# Altium PCB 电机驱动.PcbDoc
Units mil, origin at the board's own origin, x right, y up, seen from the top; angles counter-clockwise.
Board outline 3865 x 3100 mil, 2 copper layers (Top Layer, Bottom Layer); 29 components, 19 nets, 90 pads, 244 vias.
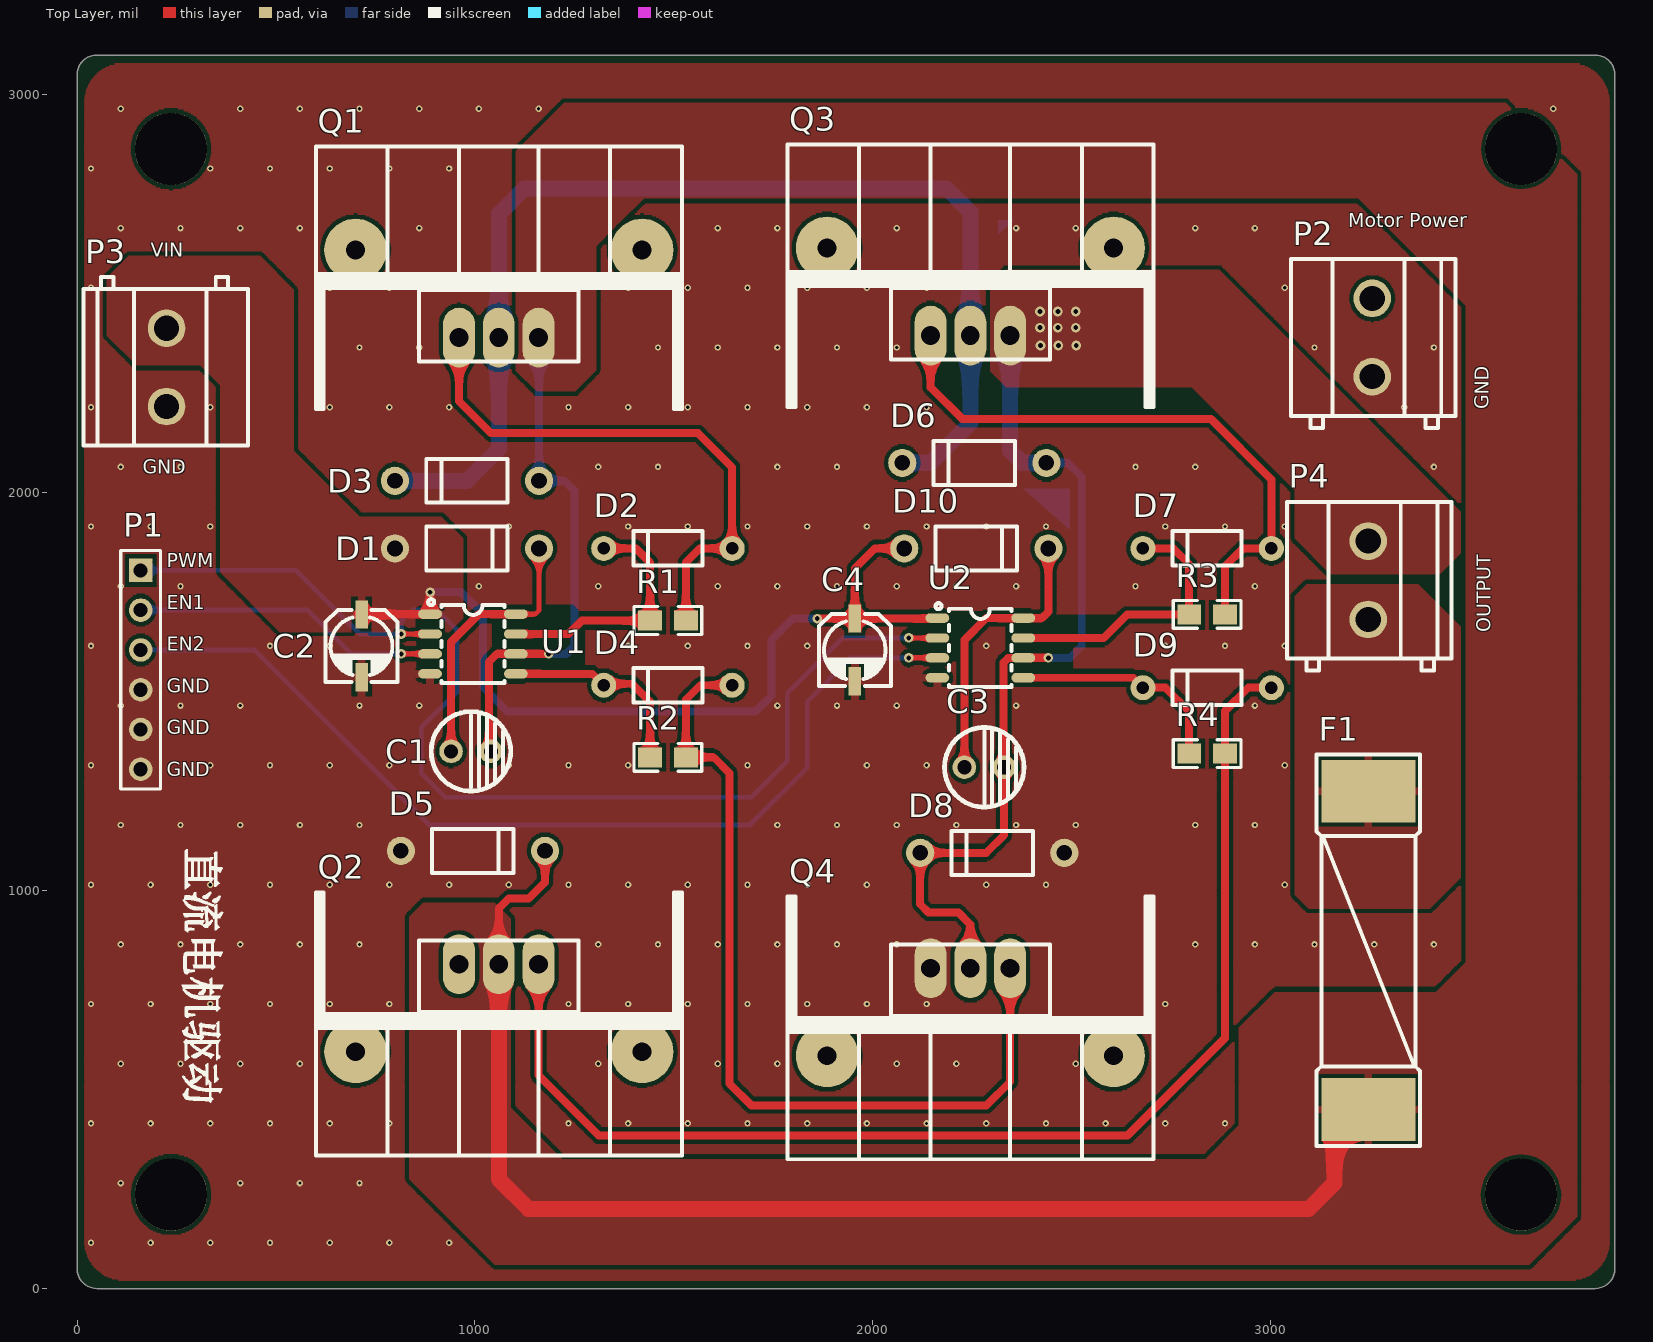
[diagram p0: Top Layer view]
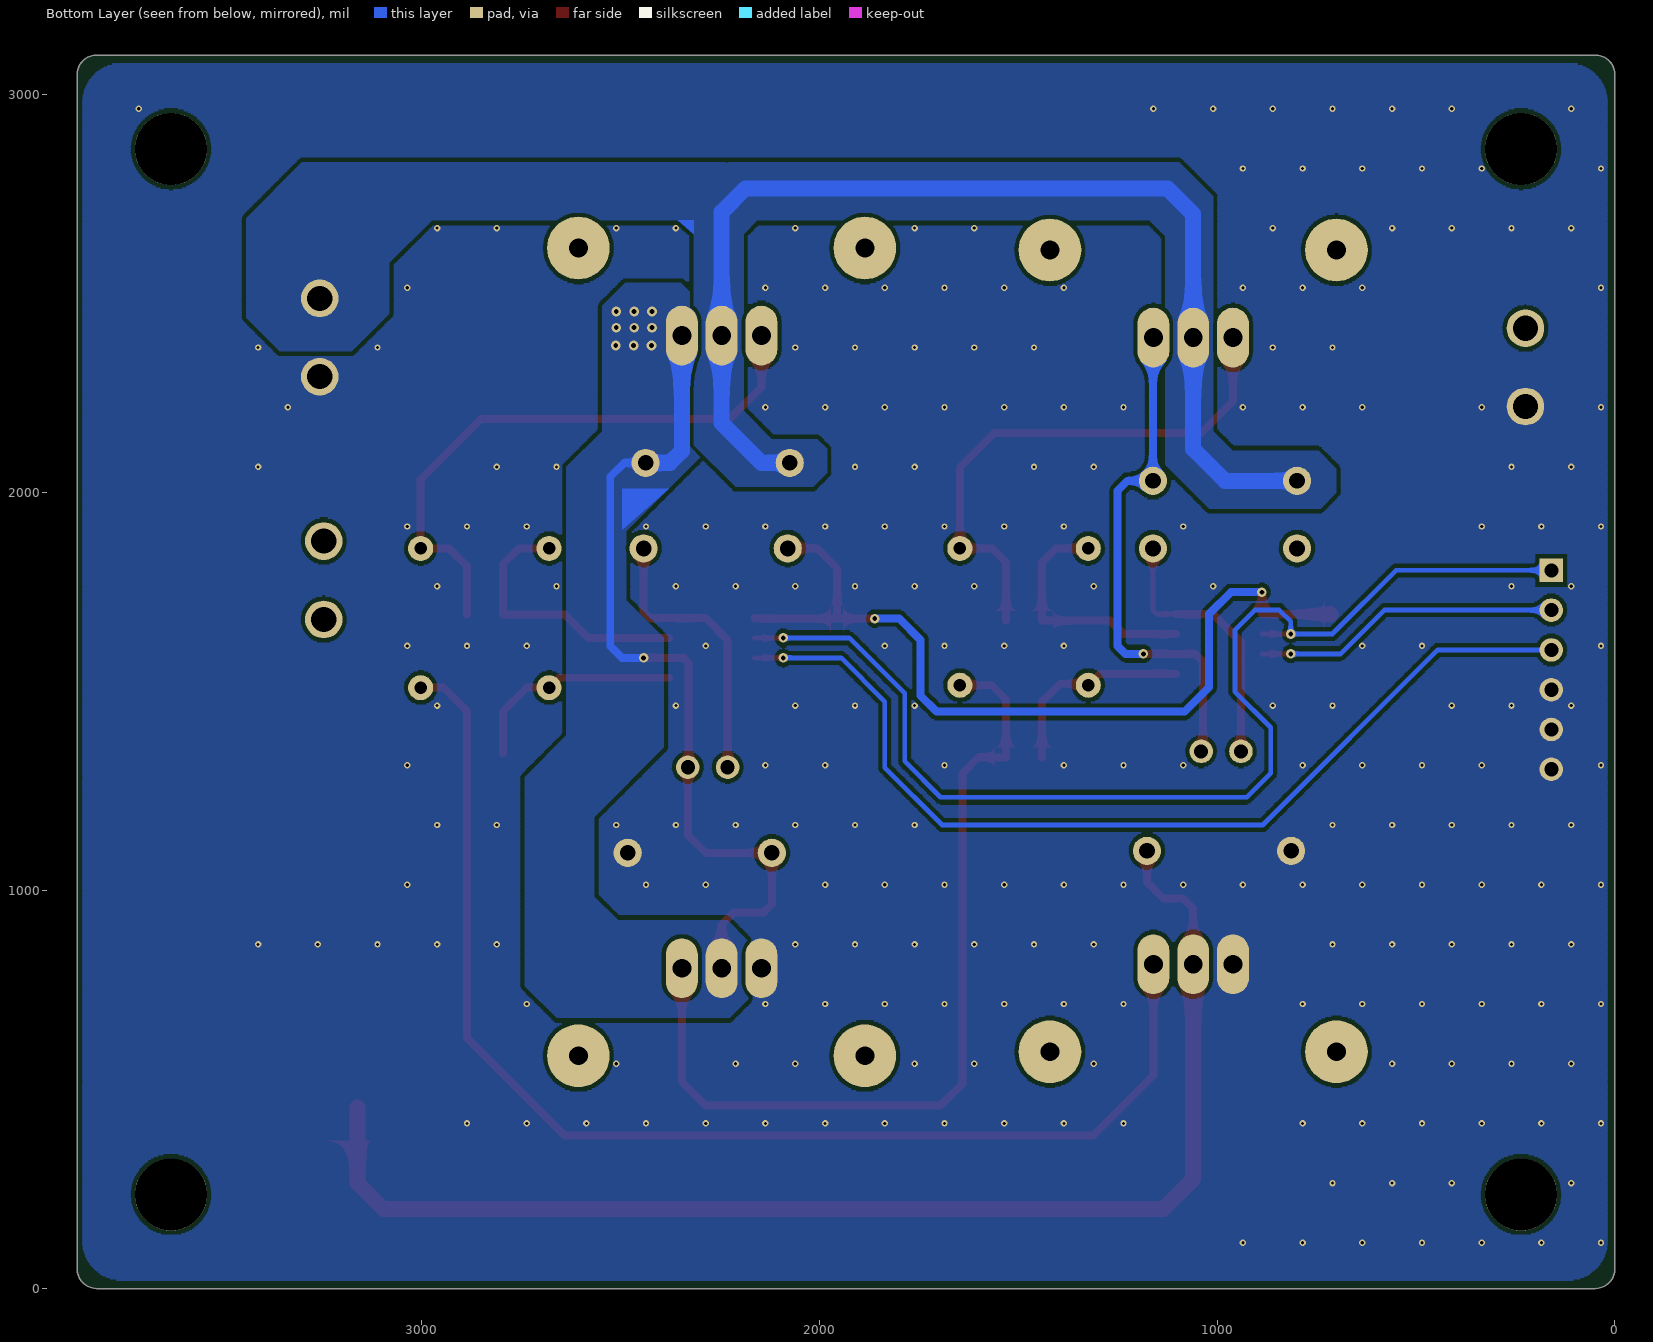
[diagram p1: Bottom Layer view, seen from below]

## Layer stack, top to bottom
Top Solder: solder mask 0.4, Solder Resist, Dk 3.5
Top Layer: signal copper 1.4
Dielectric 1: dielectric 12.6, FR-4, Dk 4.8
Bottom Layer: signal copper 1.4
Bottom Solder: solder mask 0.4, Solder Resist, Dk 3.5

## Board outline
0,50 ccw(c50,50) 50,0 3815,0 ccw(c3815,50) 3865,50 3865,3050 ccw(c3815,3050) 3815,3100 50,3100 ccw(c50,3050) 0,3050

## Design rules (kind name [scope] priority, off if disabled: settings)
Clearance [All] p1: gap=10 ignorepadtopadclearanceinfootprint=FALSE except(0: Arc-Hole Track-Hole SMDPad-Hole THPad-Hole Via-Hole Fill-Hole Poly-Hole Region-Hole Text-Hole; 24: Arc-Arc Arc-Track Track-Track)
PolygonConnect [All] p1: thpad.connectstyle=Direct thpad.reliefconductorwidth=20 thpad.reliefentries=4 thpad.polygonreliefangle="90 Angle" thpad.airgapwidth=10 smdpad.connectstyle=Relief smdpad.reliefconductorwidth=20 smdpad.reliefentries=4 smdpad.polygonreliefangle="90 Angle" smdpad.airgapwidth=10 via.connectstyle=Direct via.reliefconductorwidth=20 via.reliefentries=4 via.polygonreliefangle="90 Angle" via.airgapwidth=10
RoutingVias [All] p1: holewidth=12 width=24 viastyle="Through Hole" minholewidth=12 minwidth=24 maxholewidth=12 maxwidth=24
SolderMaskExpansion [All] p1: expansion=4
Width Signal [InNetClass('signal')] p1: maxlimit=12 minlimit=12 preferedwidth=12
Width [InNetClass('PWR')] p2: maxlimit=40 minlimit=20 preferedwidth=20
30 further rules are at their usual default settings.

## Components (designator, comment, footprint, x,y, rotation, side; value= is the part's Value field where it differs from the comment)
C1 "1.5u" CAP.1/.2 990,1345 r0 top
C2 "100nF" CAP-SMD_BD4.0-L4.3-W4.3-FD 715,1615 r270 top
C3 "1.5u" CAP.1/.2 2280,1305 r0 top
C4 "100nF" CAP-SMD_BD4.0-L4.3-W4.3-FD 1955,1605 r270 top
D1 "FR104_C402245" DO-41_BD2.4-L4.7-P8.70-D0.9-RD 980,1860 r180 top
D2 "1N4148" DO-35_BD2.0-L4.2-P8.20-D0.5-RD 1485,1860 r0 top
D3 "1N5819" DO-41_BD2.4-L4.7-P8.70-D0.9-RD 980,2030 r0 top
D4 "1N4148" DO-35_BD2.0-L4.2-P8.20-D0.5-RD 1485,1516.2 r0 top
D5 "1N5819" DO-41_BD2.4-L4.7-P8.70-D0.9-RD 995,1100 r180 top
D6 "1N5819" DO-41_BD2.4-L4.7-P8.70-D0.9-RD 2255,2075 r0 top
D7 "1N4148" DO-35_BD2.0-L4.2-P8.20-D0.5-RD 2840,1860 r0 top
D8 "1N5819" DO-41_BD2.4-L4.7-P8.70-D0.9-RD 2300,1095 r0 top
D9 "1N4148" DO-35_BD2.0-L4.2-P8.20-D0.5-RD 2840,1510 r0 top
D10 "FR104_C402245" DO-41_BD2.4-L4.7-P8.70-D0.9-RD 2260,1860 r180 top
F1 "250V 20A" FUSE-SMD_5*20MM 3245,850 r270 top
P1 "GPIO" HDR1X6 160,1805 r270 top
P2 "KF128-5.0-2P" CONN-TH_P5.00_KF128-5.0-2P 3255,2390 r90 top
P3 "KF128-5.0-2P" CONN-TH_P5.00_KF128-5.0-2P 225,2315 r270 top
P4 "KF128-5.0-2P" CONN-TH_P5.00_KF128-5.0-2P 3245,1780 r90 top
Q1 "RU7088" TO-220散热1 695,2615 r0 top
Q2 "RU7088" TO-220散热1 1425,590 r180 top
Q3 "RU7088" TO-220散热1 1880,2620 r0 top
Q4 "RU7088" TO-220散热1 2610,580 r180 top
R1 "30R" 0805R 1440,1678.8 r0 top
R2 "30R" 0805R 1440,1335 r0 top
R3 "30R" 0805R 2795,1694.31 r0 top
R4 "30R" 0805R 2795,1344.31 r0 top
U1 "IR2104" SOIC-8_L4.9-W3.9-P1.27-LS6.0-BL 995,1620 r270 top
U2 "IR2104" SOIC-8_L4.9-W3.9-P1.27-LS6.0-BL 2270,1610 r270 top

## Footprints (in the part's own frame and the unit in brackets; to place one, negate y for a bottom-side part, rotate by r counter-clockwise, add the part's x,y. Pads: shape width x height; smd on the part's side, far side on the other; paste and mask are expansions set on the pad)
0805R [mil]
  rect 60x50 smd: 1(0,0) 2(90,0)
  silkscreen extent -40,-35 130,35, body extent -4,-25 94,24, height 31
CAP-SMD_BD4.0-L4.3-W4.3-FD [mil]
  rect 70.86x31.5 smd: 1(-78.74,0) 2(78.74,0)
  silkscreen extent -91,-90 91,91
CAP.1/.2 [mm]
  round 1.5 hole 0.9: 1(-1.27,0.127) 2(1.27,0.127)
  silkscreen extent -2.54,-2.41 2.54,2.66, body extent -2.41,-2.33 2.59,2.67, height 11
CONN-TH_P5.00_KF128-5.0-2P [mm]
  round 2.4 hole 1.6: 1(-2.5,0) 2(2.5,0)
  silkscreen extent -5.76,-5.3 5,5.2
DO-35_BD2.0-L4.2-P8.20-D0.5-RD [mm]
  round 1.6 hole 0.8: 1(-4.1,0) 2(4.1,0)
  silkscreen extent -2.2,-1.1 2.2,1.1
DO-41_BD2.4-L4.7-P8.70-D0.9-RD [mm]
  round 1.8 hole 1: 1(-4.6,0) 2(4.6,0)
  silkscreen extent -2.6,-1.4 2.6,1.4
FUSE-SMD_5*20MM [mm]
  rect 4x6 smd: 1(-10.16,0) 2(10.16,0)
  silkscreen extent -12.5,-3.3 12.5,3.3
HDR1X6 [mm] "Connector; Header; 6 Position"
  rect 1.5x1.5 hole 0.9: 1(0,0)
  round 1.5 hole 0.9: 2(2.54,0) 3(5.08,0) 4(7.62,0) 5(10.16,0) 6(12.7,0)
  silkscreen extent -1.27,-1.27 13.97,1.27, body extent -1.27,-1.27 13.97,1.27, height 8.54
SOIC-8_L4.9-W3.9-P1.27-LS6.0-BL [mm]
  oval 0.6x1.518 smd: 1(-1.905,-2.74) 2(-0.635,-2.74) 3(0.635,-2.74) 4(1.905,-2.74) 5(1.905,2.74) 6(0.635,2.74) 7(-0.635,2.74) 8(-1.905,2.74)
  silkscreen extent -2.86,-2.86 2.5,2
TO-220散热1 [mil]
  oval 80x150 hole 47.24: 1(265,-225) 2(365,-225) 3(465,-225)
  round 157.48 hole 47.24: ""(5,-5) ""(725,-5)
  silkscreen extent -95,-405 825,255

## Part data
C1 C3: library part CAP+, "Capacitor"
C2 C4: library part 贴片电容, BOM_Manufacturer="Changzhou Huawei Elec", BOM_Manufacturer Part=VT1H0R1MB054000CE0, BOM_Supplier=LCSC, BOM_Supplier Part=C271438, Contributor=LCSC, nameAlias=Capacitance, spicePre=C, spiceSymbolName=VT1H0R1MB054000CE0
D1 D10: BOM_Manufacturer=LGE, BOM_Manufacturer Part=FR104, BOM_Supplier=LCSC, BOM_Supplier Part=C402245, Contributor=LCSC, spicePre=D, spiceSymbolName=FR104_C402245
D2 D4 D7 D9: BOM_Manufacturer=Semtech, BOM_Manufacturer Part=IN4148, BOM_Supplier=LCSC, BOM_Supplier Part=C14538, Contributor=LCSC, spicePre=D, spiceSymbolName=IN4148
D3 D5 D6 D8: library part 1N5819_C402218, BOM_Manufacturer=LGE, BOM_Manufacturer Part=1N5819, BOM_Supplier=LCSC, BOM_Supplier Part=C402218, Contributor=LCSC, spicePre=D, spiceSymbolName=1N5819_C402218
F1: library part 保险丝20A, BOM_Manufacturer=XCFuse, BOM_Manufacturer Part="250V 20A Glass tube fuse", BOM_Supplier=LCSC, BOM_Supplier Part=C13567, image=//image.lceda.cn/szlcsc/C13567.jpg, spicePre=F, spiceSymbolName="250V 20A Glass tube fuse"
P1: library part "Header 6", "Header, 6-Pin", LatestRevisionDate=17-Jul-2002, LatestRevisionNote="Re-released for DXP Platform.", Publisher="Altium Limited"
P2 P3 P4: library part KF128-2P, BOM_Manufacturer="Cixi Kefa Elec", BOM_Manufacturer Part=KF128-5.0-2P, BOM_Supplier=LCSC, BOM_Supplier Part=C474950, Contributor=LCSC, spicePre=U, spiceSymbolName=KF128-5.0-2P
R1 R2 R3 R4: library part Res, "Resistor"
U1 U2: BOM_LCSC Assembly=Yes, BOM_Manufacturer=IR, BOM_Manufacturer Part=IR2104STRPBF, BOM_Supplier=LCSC, BOM_Supplier Part=C2960, image=//image.lceda.cn/szlcsc/C2960.jpg, SMT Type=Extend, spicePre=X, spiceSymbolName=IR2104STRPBF

## Free pads (board coordinates)
  round 181.1 hole 181.1: ""(236.22,236.22) ""(236.22,2863.78) ""(3628.78,236.22) ""(3628.78,2863.78)

## Via types
v1: diameter 16, hole 8, Top Layer to Bottom Layer, 227 vias
v2: diameter 24, hole 12, Top Layer to Bottom Layer, tented both sides, 17 vias

## Nets (pads, with @x,y where several pads share a name; then routed paths per layer and width w, separated by ;. In a path a pad name is that pad's centre, name@x,y a point inside that pad or via, vN(x,y) a via of type N, cw(c..) or ccw(c..) an arc to the next point about the centre after c; other vN are vias at no path point)
#EN1: P1.2 U1.3 | length 772.7
  Top Layer w12: v2(815,1595) U1.3
  Bottom Layer w12: P1.2 579.29,1705 689.29,1595 v2(815,1595)
#EN2: P1.3 U2.3 | length 2455.5
  Top Layer w12: v2(2090,1585) U2.3
  Bottom Layer w12: P1.3 445,1605 885,1165 1690.91,1165 1835,1309.09 1835,1475 1945,1585 v2(2090,1585)
+12V: C2.1 C4.1 D1.2 D10.2 P3.1 U1.1 U2.1 | length 2184.8
  Top Layer w20: C2.1@716.26,1695 U1.1 v2(887.13,1750) ; v2(1860,1683.74) C4.1 ; D10.2 2005,1860 1955,1810 C4.1 ; U2.1 2160.87,1683.74 C4.1
  Top Layer w40: C2.1 C2.1@716.26,1695
  Bottom Layer w20: v2(887.13,1750) 965,1750 1020,1695 1020,1511.2 1081.2,1450 1705,1450 1745,1490 1745,1630 1798.74,1683.74 v2(1860,1683.74)
+15V: D3.1 D6.1 P2.2 Q1.2 Q3.2 | length 2863.5
  Bottom Layer w40: D3.1 980,2030 1060,2110 Q1.2 1060,2700 1125,2765 2185,2765 2245,2705 Q3.2 2245,2175 2145,2075 D6.1
GND: C2.2 C4.2 D5.2 D8.2 P1.4 P1.5 P1.6 P2.1 P3.2 Q2.3 Q4.3 U1.4 U2.4
  other v1: 35,115 185,115 335,115 485,115 635,115 785,115 935,115 110,265 410,265 560,265 710,265 35,415 185,415 335,415 485,415 635,415 785,415 1235,415 1385,415 1535,415 1685,415 1835,415 1985,415 2135,415 2285,415 2435,415 2585,415 2735,415 2885,415 110,565 260,565 410,565 560,565 1310,565 1610,565 1760,565 2060,565 2210,565 2510,565 35,715 185,715 335,715 485,715 635,715 785,715 1235,715 1385,715 1535,715 1685,715 1835,715 1985,715 2135,715 2735,715 110,865 260,865 410,865 560,865 710,865 1310,865 1460,865 1610,865 1760,865 1910,865 2060,865 2810,865 2960,865 3110,865 3260,865 3410,865 35,1015 185,1015 335,1015 485,1015 635,1015 785,1015 935,1015 1085,1015 1235,1015 1385,1015 1535,1015 1685,1015 1835,1015 1985,1015 2285,1015 2435,1015 3035,1015 110,1165 260,1165 410,1165 560,1165 710,1165 1760,1165 1910,1165 2060,1165 2210,1165 2360,1165 2510,1165 2810,1165 2960,1165 35,1315 335,1315 485,1315 635,1315 785,1315 1085,1315 1235,1315 1385,1315 1685,1315 1985,1315 2135,1315 3035,1315 110,1465 260,1465 410,1465 710,1465 860,1465 1760,1465 1910,1465 2060,1465 2360,1465 2960,1465 35,1615 485,1615 635,1615 1385,1615 1535,1615 1685,1615 1835,1615 2285,1615 2735,1615 2885,1615 3035,1615 110,1765 260,1765 1010,1765 1310,1765 1610,1765 1760,1765 1910,1765 2060,1765 2210,1765 2360,1765 2660,1765 2960,1765 35,1915 185,1915 335,1915 1085,1915 1385,1915 1535,1915 1685,1915 1835,1915 1985,1915 2135,1915 2285,1915 2435,1915 2735,1915 2885,1915 3035,1915 110,2065 260,2065 1310,2065 1460,2065 1760,2065 1910,2065 2660,2065 2810,2065 3410,2065 35,2215 335,2215 635,2215 785,2215 935,2215 1235,2215 1385,2215 1535,2215 1685,2215 1835,2215 1985,2215 2135,2215 3335,2215 710,2365 860,2365 1460,2365 1610,2365 1760,2365 1910,2365 2060,2365 3110,2365 3410,2365 35,2515 635,2515 785,2515 935,2515 1385,2515 1535,2515 1685,2515 1835,2515 1985,2515 2135,2515 3035,2515 110,2665 260,2665 410,2665 560,2665 860,2665 1610,2665 1760,2665 2060,2665 2360,2665 2510,2665 2810,2665 2960,2665 35,2815 335,2815 485,2815 635,2815 785,2815 935,2815 110,2965 410,2965 560,2965 710,2965 860,2965 1010,2965 1160,2965 3710,2965
LO1: D4.2 Q4.1 R2.2 | length 2220.6
  Top Layer w20: D4.2 1566.2,1516.2 1530,1480 R2.2 1600,1335 1640,1295 1640,515 1695,460 2285,460 2345,520 Q4.1
LO2: D9.2 Q2.1 R4.2 | length 3130.1
  Top Layer w20: Q2.1 1160,536.1 1311.1,385 2640,385 2885,630 R4.2 2885,1451.42 2943.58,1510 D9.2
motor1: C1.2 D3.2 D5.1 F1.2 Q1.3 Q2.2 U1.6 | length 4558.7
  Top Layer w20: C1.2 1035,1355 1035,1575 1055,1595 U1.6 v2(1185,1595) ; Q2.2 1060,955 1085,980 1135,980 1176.1,1021.1 D5.1
  Top Layer w40: Q2.2 1060,275 1135,200 3095,200 3160,265 F1.2@3160,455
  Bottom Layer w20: Q1.3 1161.1,2388.9 D3.2 1225,2030 1250,2005 1250,1615 1230,1595 v2(1185,1595)
motor2: C3.2 D6.2 D8.1 P4.2 Q3.3 Q4.2 U2.6 | length 2187.2
  Top Layer w20: Q4.2 2245,915 2215,945 2140,945 2118.9,966.1 D8.1 2285,1095 2330,1140 C3.2 2327.99,1310 2327.99,1572.99 2340,1585 U2.6 v2(2441.1,1585)
  Bottom Layer w20: D6.2 2490,2075 2525,2040 2525,1615 2495,1585 v2(2441.1,1585)
  Bottom Layer w40: Q3.3 2345,2105 2375,2075 D6.2
  other v2: 2421.32,2370 2466.32,2370 2511.32,2370 2420,2415 2465,2415 2510,2415 2420,2455.43 2465,2455.43 2510,2455.43
NetC1_1: C1.1 D1.1 U1.8 | length 684.3
  Top Layer w12: U1.8 1151.26,1695 1161.1,1704.84 D1.1
  Top Layer w20: C1.1 940,1625 1010,1695 U1.8
NetC3_1: C3.1 D10.1 U2.8 | length 719.5
  Top Layer w20: C3.1 2230,1630 2285,1685 U2.8 2425,1685 2441.1,1701.1 D10.1
NetD2_1: D2.1 R1.1 U1.7 | length 628.2
  Top Layer w20: U1.7 1235,1645 1268.8,1678.8 R1.1 1440,1825 1405,1860 D2.1
NetD2_2: D2.2 Q1.1 R1.2 | length 1396.1
  Top Layer w20: Q1.1 960,2230 1040,2150 1560,2150 1646.42,2063.58 D2.2 1565,1860 1530,1825 R1.2
NetD4_1: D4.1 R2.1 U1.5 | length 509.3
  Top Layer w20: U1.5 1294.79,1545 D4.1 1327.38,1520 1395,1520 1440,1475 R2.1
NetD7_1: D7.1 R3.1 U2.7 | length 700.4
  Top Layer w20: U2.7 2580,1635 2639.31,1694.31 R3.1 2795,1820 2755,1860 D7.1
NetD7_2: D7.2 Q3.1 R3.2 | length 1511.6
  Top Layer w20: Q3.1 2145,2265 2225,2185 2850,2185 3001.42,2033.58 D7.2 2930,1860 2885,1815 R3.2
NetD9_1: D9.1 R4.1 U2.5 | length 558
  Top Layer w20: U2.5 2653.58,1535 D9.1 2735,1510 2795,1450 R4.1
NetF1_1: F1.1 P4.1
PWM: P1.1 U1.2 U2.2 | length 2982.4
  Top Layer w12: v2(815,1645) U1.2 ; v2(2090,1635) U2.2
  Bottom Layer w12: P1.1 550,1805 710,1645 v2(815,1645) 815,1676.58 843.43,1705 905,1705 955,1655 955,1500 865,1410 865,1295 925,1235 1695,1235 1785,1325 1785,1495.71 1924.29,1635 v2(2090,1635)
pads on no net: Q1. Q2. Q3. Q4.

## Polygon pours and split planes (outlines as drawn)
GND on Bottom Layer "Bottom Layer-GND" (hatched Horizontal grid 4 track 5, remove dead copper, pour order 92): 3750,3080 cw(c3750,2980) 3850,2980 3850,120 cw(c3750,120) 3750,20 120,20 cw(c120,120) 20,120 20,2980 cw(c120,2980) 120,3080
motor2 on Bottom Layer "Bottom Layer-motor2" (solid, remove dead copper, pour order 40): 2505,925 2565,985 2565,1185 2390,1360 2390,1635 2485,1730 2485,1903.14 2295,2093.14 2295,2475.35 2347.32,2527.68 2487.32,2527.68 2545,2470 2545,2155 2635,2065 2635,1390 2740,1285 2740,760 2660,680 2225,680 2165,740 2165,860 2230,925
+15V on Bottom Layer "Bottom Layer-+12V 1" (solid, remove dead copper, pour order 10): 1980,2050 2015,2015 2210,2015 2315,2120 2315,2355 2315,2745 2230,2830 1095,2830 1010,2745 1010,2530 1010,2155 960,2105 745,2105 700,2060 700,2000 740,1960 1020,1960 1130,2070 1130,2645 1170,2685 2155,2685 2190,2650 2190,2206.1 2118.9,2135 2005,2135 1980,2110
no net on Bottom Layer "Bottom Layer-No Net 5" (solid, remove dead copper, pour order 80): 205,3075
no net on Bottom Layer "Bottom Layer-No Net" (solid, remove dead copper, pour order 58): 2485.37,1905
no net on Bottom Layer "Bottom Layer-No Net 1" (solid, remove dead copper, pour order 56): 2378.14,2010
no net on Bottom Layer "Bottom Layer-No Net 2" (solid, remove dead copper, pour order 54): 2378.14,2010
no net on Bottom Layer "Bottom Layer-No Net 3" (solid, remove dead copper, pour order 52): 2378.14,2010
no net on Bottom Layer "Bottom Layer-No Net 4" (solid, remove dead copper, pour order 50): 2485.37,1985
no net on Bottom Layer "NONET_L02_P048" (solid, remove dead copper, pour order 48): 2445,2010
no net on Bottom Layer "Bottom Layer-No Net 6" (solid, remove dead copper, pour order 46): 2485,2010
no net on Bottom Layer "Bottom Layer-No Net 7" (solid, remove dead copper, pour order 44): 2455,2010
no net on Bottom Layer "Bottom Layer-No Net 8" (solid, remove dead copper, pour order 42): 2455,2010
+15V on Bottom Layer "Bottom Layer-+12V" (solid, remove dead copper, pour order 16): 2230,2830 3300,2830 3440,2690 3440,2440 3355,2355 3175,2355 3080,2450 3080,2577.65 2972.65,2685 2315,2685
GND on Top Layer "Top Layer-GND" (hatched Horizontal grid 4 track 5, remove dead copper, pour order 86): 3750,3080 cw(c3750,2980) 3850,2980 3850,120 cw(c3750,120) 3750,20 120,20 cw(c120,120) 20,120 20,2980 cw(c120,2980) 120,3080
motor2 on Top Layer "Top Layer-motor2" (solid, remove dead copper, pour order 38): 2870,2560 3164.02,2265.98 3380,2050 3477.26,1952.74 3477.25,1847.61 3424.64,1795 3150,1795 3060,1885 3060,2006.82 2801.82,2265 2335,2265 2295,2305 2295,2520 2335,2560
+12V on Top Layer "Top Layer-+15V" (solid, remove dead copper, pour order 12): 935,1650 970,1685 970,1885 915,1940 710,1940 545,2105 545,2510 460,2595 130,2595 75,2540 75,2395 150,2320 310,2320 360,2270 360,1800 510,1650
motor1 on Top Layer "Top Layer-motor1 2" (solid, remove dead copper, pour order 20): 1050,970 1090,930 1090,455 1220,325 2835,325 2920,410 2920,655 3010,745 3415,745 3485,675 3485,250 3295,60 1050,60 835,275 835,935 870,970
motor1 on Top Layer "Top Layer-motor1" (solid, remove dead copper, pour order 32): 3650,60 3770,180 3770,250 3415,605 3055,605 2975,525 2975,60
motor1 on Top Layer "Top Layer-motor1 1" (solid, remove dead copper, pour order 28): 3415,745 3490,820 3490,2470 3220,2740 1425,2740 1305,2620 1305,2307.5 1252.5,2255 1155,2255 1102.87,2307.13 1102.87,2857.87 1225,2980 3590,2980 3770,2800 3770,250 3485,250
no net on Top Layer "Top Layer-No Net" (solid, remove dead copper, pour order 36): 2285,2555
NetF1_1 on Top Layer "Top Layer-NetF1_1" (solid, remove dead copper, pour order 34): 3370,1770 3477.26,1662.74 3477.26,1032.26 3400,955 3095,955 3060,990 3060,1740 3090,1770
no net on Top Layer "Top Layer-No Net 1" (solid, remove dead copper, pour order 24): 3455,775
no net on Top Layer "Top Layer-No Net 2" (solid, remove dead copper, pour order 22): 2963.58,745

## Other copper
Top Layer:
  pour cut-out: 920.27,1633
  pour cut-out: 849.51,1685 924.75,1685 924.75,1565 850.47,1565
  pour cut-out: 2372.54,1696.52 2627.33,1696.52 2565.81,1635 2505,1635 2505,1555.83 2470,1520.83 2364.89,1520.83 2331.1,1554.63 2331.1,1670.74 2356.75,1696.39
  pour cut-out: 2100,1704.17 2100.33,1703.84 2277.2,1703.84 2277.2,1692.41 2219.78,1635 2219.78,1575 2100,1575 2085,1590 2085,1698.84 2090,1703.84
  pour cut-out: 1070,1718.27 1249.71,1718.27 1279.04,1688.94 1279.04,1524.61 1050.97,1524.61 1040,1535.58 1040,1703.27 1055,1718.27
Bottom Layer:
  region net motor2: 2378.14,2010 2494.42,2010 2494.42,1906.98
  region net motor2: 2378.14,2010
  region net +15V: 2314.74,2650 2314.74,2684.74 2315,2685 2355,2685

## Silkscreen, mask and mechanical layers (free items; w line width, h text height)
Top Overlay:
  drawing of 1567 lines, arcs and shapes, not listed
  text "Motor Power" at 3195,2655 h60
  text "VIN" at 185,2580 h60
  text "GND" at 3560,2210 h60 r90
  text "GND" at 165,2035 h60
  text "PWM" at 225,1800 h60
  text "EN1" at 225,1694.86 h60
  text "OUTPUT" at 3565,1650 h60 r90
  text "EN2" at 225,1589.71 h60
  text "GND" at 225,1485.29 h60
  text "GND" at 225,1380.14 h60
  text "GND" at 225,1275 h60
Mechanical 1:
  lines w10: 0,50 ccw(c50,50) 50,0 3815,0 ccw(c3815,50) 3865,50 3865,3050 ccw(c3815,3050) 3815,3100 335,3100 50,3100 ccw(c50,3050) 0,3050 0,50

## Dimensions
50,3100 to 50,0 on Mechanical 1
0,3050 to 3865,3050 on Mechanical 1